# Altium PCB WX0.012.032PCB-4.2.PcbDoc
Units mil, origin at the board's own origin, x right, y up, seen from the top; angles counter-clockwise.
Board outline 5246.25 x 8356.49 mil, 2 copper layers (Top Layer, Bottom Layer); 36 components, 37 nets, 102 pads, 174 vias.
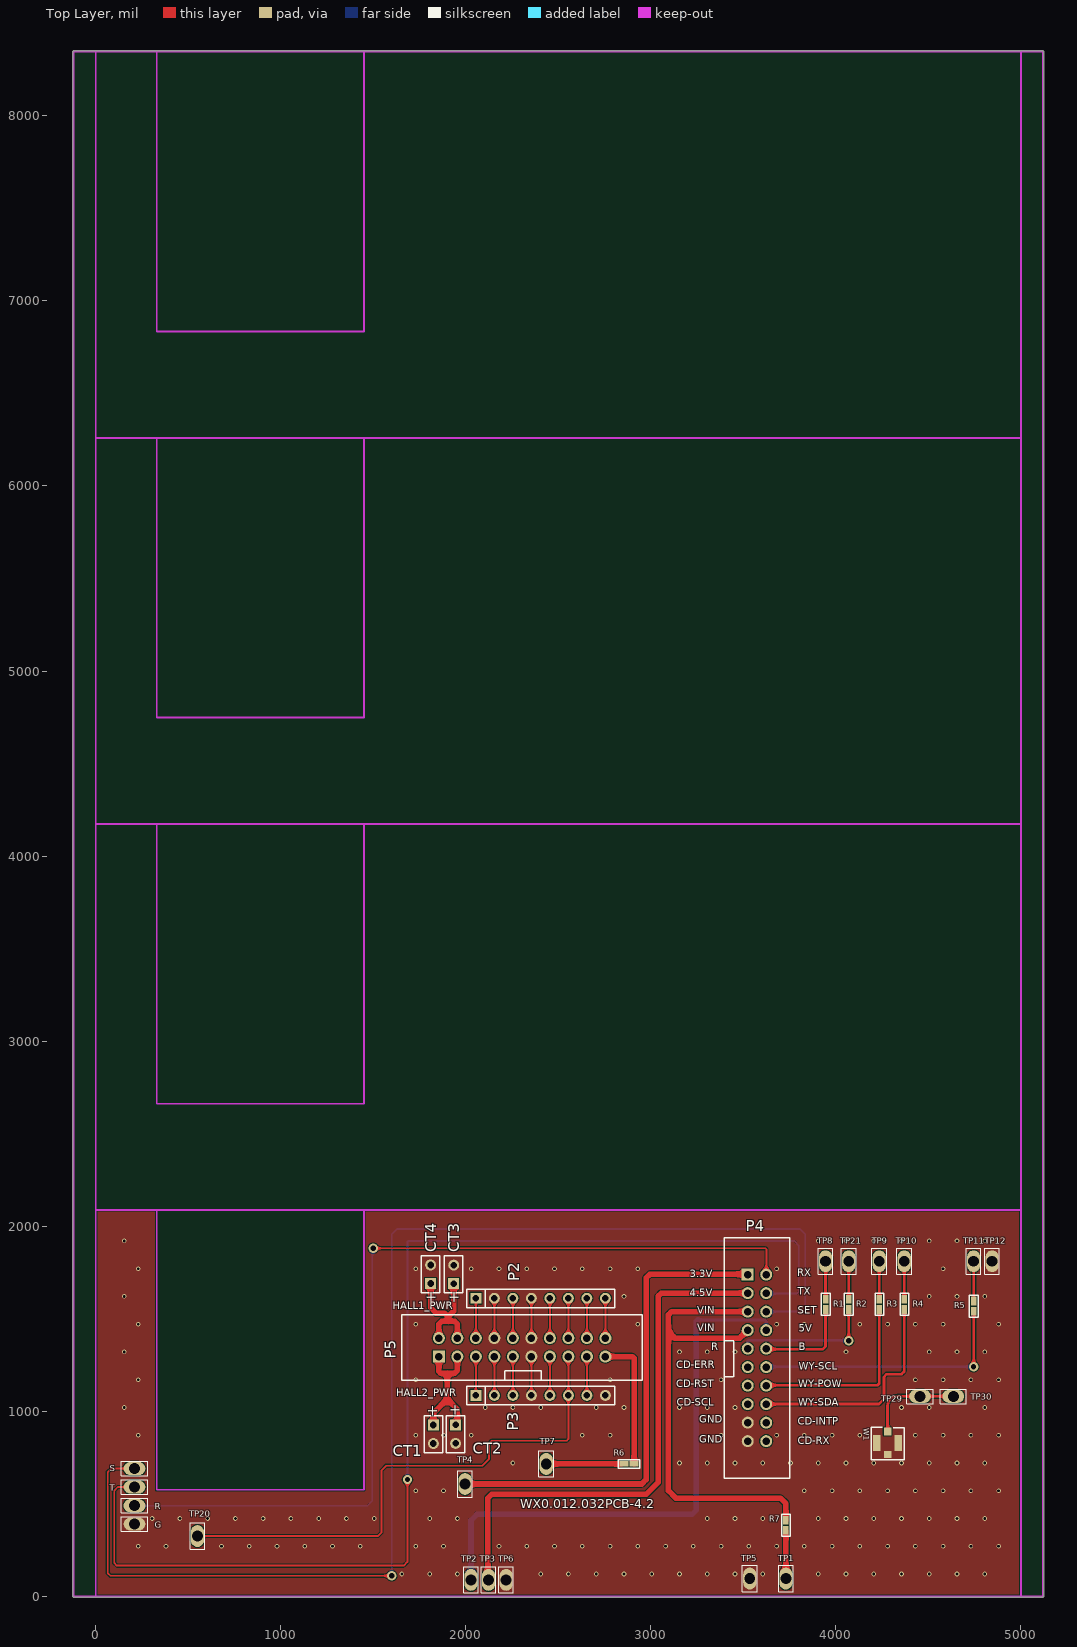
[diagram p0: Top Layer view]
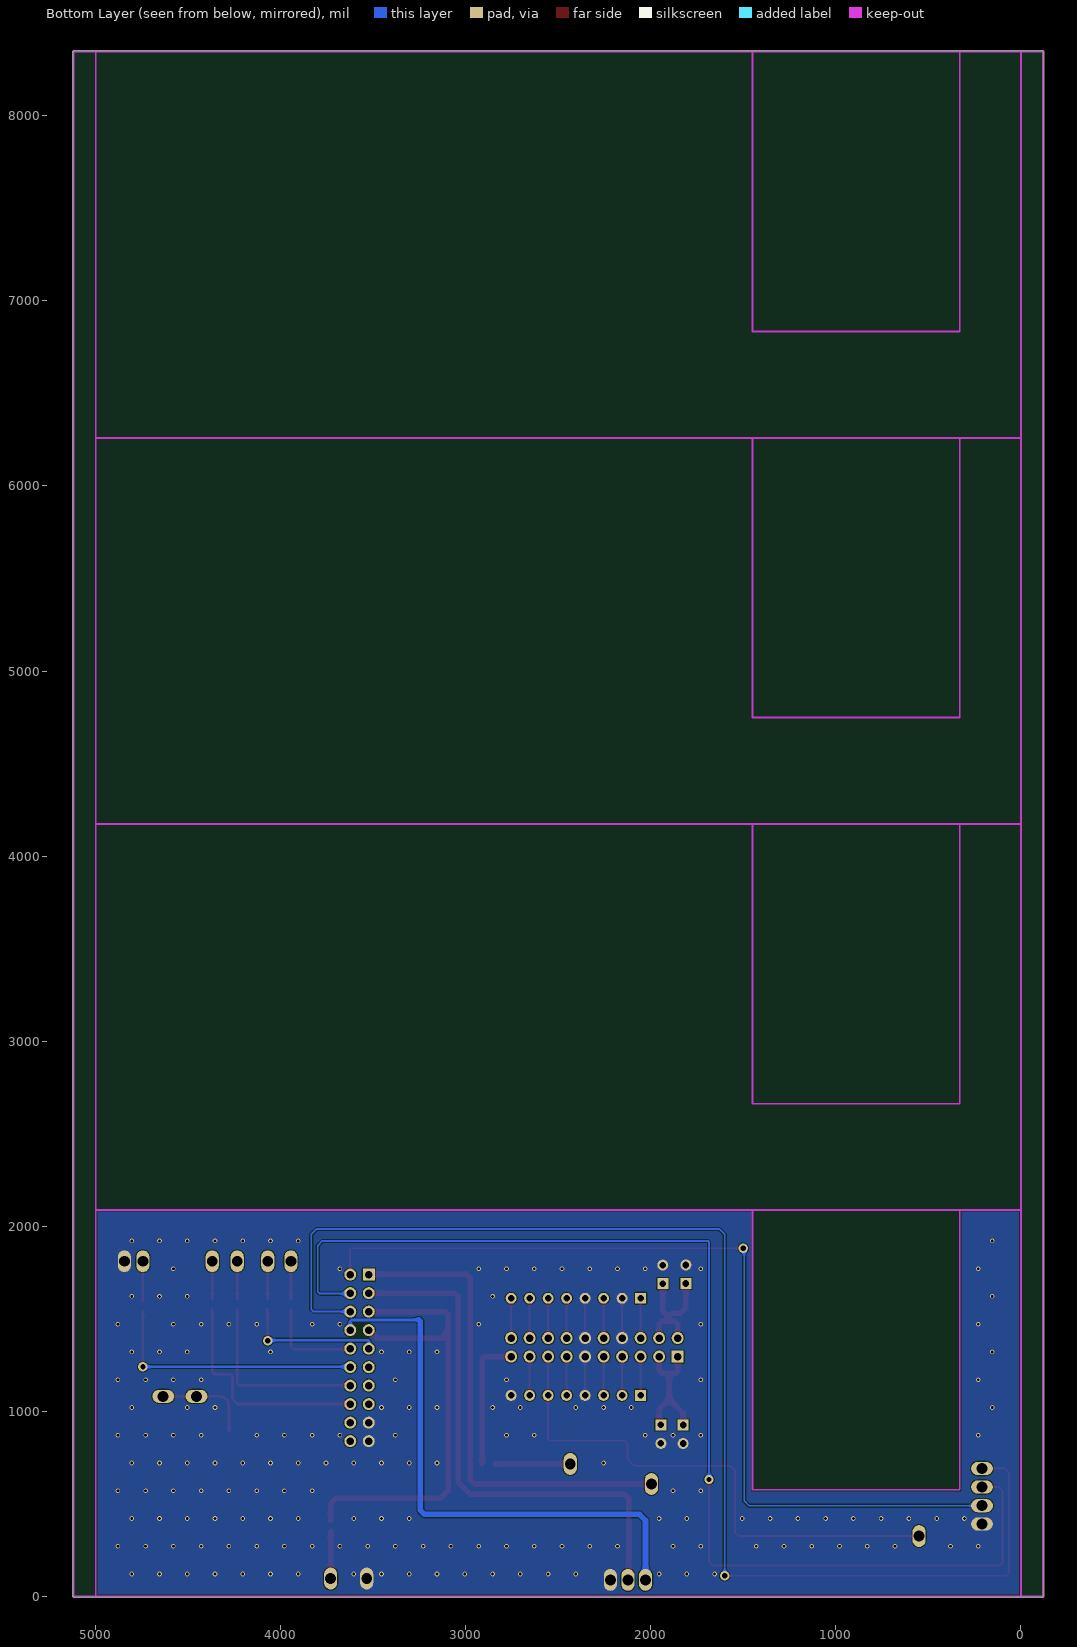
[diagram p1: Bottom Layer view, seen from below]

## Layer stack, top to bottom
Top Solder: solder mask 0.4, Solder Resist, Dk 3.5
Top Layer: signal copper 1.4
Dielectric 1: dielectric 12.6, FR-4, Dk 4.8
Bottom Layer: signal copper 1.4
Bottom Solder: solder mask 0.4, Solder Resist, Dk 3.5

## Board outline
-118.11,-5.01 cw(c-118.11,0) -123.13,0 -123.13,8346.46 cw(c-118.11,8346.46) -118.11,8351.47 5118.11,8351.47 cw(c5118.11,8346.46) 5123.13,8346.46 5123.13,0 cw(c5118.11,0) 5118.11,-5.01

## Design rules (kind name [scope] priority, off if disabled: settings)
Clearance [All] p1: gap=5 ignorepadtopadclearanceinfootprint=TRUE
ComponentClearance [All] p1: gap=10 collisioncheckmode=3 verticalgap=0 showdistances=FALSE
HoleToHoleClearance [All] p1: gap=0 allowstackedmicrovias=TRUE
MinimumSolderMaskSliver [All] p1: minsoldermaskwidth=0
PlaneConnect [All] p1: planeconnectstyle=Direct reliefexpansion=20 reliefentries=4 reliefconductorwidth=10 reliefairgap=10
PolygonConnect [All] p1: connectstyle=Direct reliefconductorwidth=10 reliefentries=4 polygonreliefangle="90 Angle" airgapwidth=10
RoutingVias [All] p1: holewidth=28 width=50 viastyle="Through Hole" minholewidth=28 minwidth=50 maxholewidth=28 maxwidth=50
SilkToSilkClearance [All] p1: silktosilkclearance=0
SilkToSolderMaskClearance [IsPad] p1: minsilkscreentomaskgap=0 clearancetoexposedcopper=TRUE
SolderMaskExpansion [All] p1: expansion=4
Width [All] p1: maxlimit=50 minlimit=10 preferedwidth=10
24 further rules are at their usual default settings.

## Components (designator, comment, footprint, x,y, rotation, side; value= is the part's Value field where it differs from the comment)
CT1 "BAT" BAT2 1824.95,874.53 r270 top
CT2 "BAT" BAT2 1945,875 r270 top
CT3 "BAT" BAT2 1935,1740 r90 top (schematic designator CT1)
CT4 "BAT" BAT2 1810.05,1740.47 r90 top (schematic designator CT1)
G "Test Point" TP5 210,390 r270 top (schematic designator TP7)
P2 "Header 8" HDR1X8 2055,1610 r0 top
P3 "Header 8" HDR1X8 2055,1085 r0 top
P4 "" PHD254_2X10P 3574,1288 r0 top
P5 "" PHD254_2X10P 2305,1345 r90 top (schematic designator P4)
R "Test Point" TP5 209.39,489 r270 top (schematic designator TP7)
R1 "22" R0603LLL 3945,1544.1 r90 top
R2 "22" R0603LLL 4070,1544.1 r90 top (schematic designator R1)
R3 "22" R0603LLL 4235,1543.9 r90 top (schematic designator R1)
R4 "22" R0603LLL 4370,1543.9 r90 top (schematic designator R1)
R5 "22" R0603LLL 4745,1533.9 r90 top (schematic designator R1)
R6 "22" R0603LLL 2848.9,715 r0 top (schematic designator R1)
R7 "22" R0603LLL 3730,349.92 r90 top (schematic designator R1)
S "Test Point" TP5 210,690 r270 top (schematic designator TP7)
T "Test Point" TP5 210,590 r270 top (schematic designator TP7)
TP1 "Test Point" TP5 3730,95 r0 top (schematic designator TP7)
TP2 "Test Point" TP5 2028.39,88.2 r0 top (schematic designator TP7)
TP3 "Test Point" TP5 2123.39,88.2 r0 top (schematic designator TP7)
TP4 "Test Point" TP5 1996.39,606.2 r0 top (schematic designator TP7)
TP5 "Test Point" TP5 3535,95 r0 top (schematic designator TP7)
TP6 "Test Point" TP5 2218.39,88.2 r0 top (schematic designator TP7)
TP7 "Test Point" TP5 2435,715 r0 top
TP8 "Test Point" TP5 3945,1810 r0 top (schematic designator TP7)
TP9 "Test Point" TP5 4235,1810 r0 top (schematic designator TP7)
TP10 "Test Point" TP5 4370,1810 r0 top (schematic designator TP7)
TP11 "Test Point" TP5 4745,1810 r0 top (schematic designator TP7)
TP12 "Test Point" TP5 4845,1810 r0 top (schematic designator TP7)
TP20 "Test Point" TP5 550,325 r0 top (schematic designator TP7)
TP21 "Test Point" TP5 4070,1810 r0 top (schematic designator TP7)
TP29 "Test Point" TP5 4455,1080 r270 top (schematic designator TP7)
TP30 "Test Point" TP5 4635,1080 r270 top (schematic designator TP7)
W1 "ANT-IPEX" ANT-IPEX 4280,829.96 r180 top

## Footprints (in the part's own frame and the unit in brackets; to place one, negate y for a bottom-side part, rotate by r counter-clockwise, add the part's x,y. Pads: shape width x height; smd on the part's side, far side on the other; paste and mask are expansions set on the pad)
ANT-IPEX [mm] "IPX天线座"
  rect 1x1.05 smd: 1(0,-1.525)
  rect 1x2.2 smd: 2(-1.475,0.025) 2(1.475,0.025)
  rect 1x1 smd: 2(0,1.626)
  silkscreen extent -2.26,-2.08 2.26,2.38
BAT2 [mm]
  rect 1.5x1.5 hole 0.9: 1(-1.282,0.001)
  round 1.5 hole 0.9: 2(1.258,0.001)
  silkscreen extent -2.55,-1.27 2.53,1.27
HDR1X8 [mm] "Connector; Header; 8 Position"
  rect 1.5x1.5 hole 0.9: 1(0,0)
  round 1.5 hole 0.9: 2(2.54,0) 3(5.08,0) 4(7.62,0) 5(10.16,0) 6(12.7,0) 7(15.24,0) 8(17.78,0)
  silkscreen extent -1.27,-1.27 19.05,1.27, body extent -1.27,-1.27 19.05,1.27, height 8.54
PHD254_2X10P [mil]
  rect 65x65 hole 40: 1(-50,450)
  round 65 hole 40: 2(50,450) 3(-50,350) 4(50,350) 5(-50,250) 6(50,250) 7(-50,150) 8(50,150) 9(-50,50) 10(50,50) 11(-50,-50) 12(50,-50) 13(-50,-150) 14(50,-150) 15(-50,-250) 16(50,-250) 17(-50,-350) 18(50,-350) 19(-50,-450) 20(50,-450)
  silkscreen extent -177,-650 177,650
R0603LLL [mil]
  rect 47.24x31 smd: 1(5.9,0) 2(61.1,0)
  silkscreen extent -26,-24 92,23
TP5 [mm]
  oval 1.8x3 hole 1.5: 1(0,0)
  silkscreen extent -1,-1.8 1,1.8

## Part data
CT1 CT2 CT3 CT4: "电池"
G R S T TP1 TP2 TP3 TP4 TP5 TP6 TP7 TP8 TP9 TP10 TP11 TP12 TP20 TP21 TP29 TP30: library part "Test Point  PASS", "测试点"
P2 P3: "Header, 8-Pin"
P4 P5: library part "Header 10X2  PASS", "Header, 10-Pin, Dual row"
R1 R2 R3 R4 R5 R6 R7: library part RES2
W1: library part 1010902-0053, "IPEX，配GPRS天线转接线"

## Via types
v1: diameter 25, hole 15, Top Layer to Bottom Layer, tented both sides, 169 vias
v2: diameter 50, hole 28, Top Layer to Bottom Layer, tented both sides, 5 vias

## Nets (pads, with @x,y where several pads share a name; then routed paths per layer and width w, separated by ;. In a path a pad name is that pad's centre, name@x,y a point inside that pad or via, vN(x,y) a via of type N, cw(c..) or ccw(c..) an arc to the next point about the centre after c; other vN are vias at no path point)
3.3V: P4.1 TP4.1 | length 2636.6
  Top Layer w30: TP4.1 2951.2,606.2 2975,630 2975,1720 2995,1740 3522,1740 P4.1
3.6V: P4.3 TP3.1 | length 2895.5
  Top Layer w30: TP3.1 2120,91.58 2120,530 2140,550 2975,550 3040,615 3040,1621 3057,1638 P4.3
5V: P4.8 TP2.1 | length 3016.3
  Bottom Layer w15: 3253,1493 3617,1493 3625,1485 3625,1439 P4.8
  Bottom Layer w30: TP2.1 2028.39,410 2060,441.61 3223.39,441.61 3245,463.23 3245,1485 3253,1493
119: P3.6 P5.15 TP20.1 | length 2913.5
  Top Layer w10: TP20.1 1525,325 1545,345 1545,680 1570,705 2090,705 2125,740 2125,825 2140,840 2545,840 2555,850 P3.6 P5.15
GND: CT1.2 CT2.2 CT3.2 CT4.2 G.1 P2.2 P2.4 P3.4 P3.8 P4.17 P4.19 P5.8 P5.11 P5.12 TP5.1 TP6.1 TP12.1 W1.2 | length 642.1
  Top Layer w10: P2.2@2150,1610 2155,1605 P5.8 ; P3.4 P5.11 ; P5.12 P2.4
  other v1: 1655,120 1805,120 1955,120 2405,120 2555,120 2705,120 2855,120 3005,120 3155,120 3305,120 3455,120 3605,120 3905,120 4055,120 4205,120 4355,120 4505,120 4655,120 4805,120 230,270 380,270 680,270 830,270 980,270 1130,270 1280,270 1430,270 1730,270 1880,270 2180,270 2330,270 2480,270 2630,270 2780,270 2930,270 3080,270 3230,270 3380,270 3530,270 3680,270 3830,270 3980,270 4130,270 4280,270 4430,270 4580,270 4730,270 4880,270 305,420 455,420 605,420 755,420 905,420 1055,420 1205,420 1355,420 1505,420 1805,420 1955,420 3305,420 3455,420 3605,420 3905,420 4055,420 4205,420 4355,420 4505,420 4655,420 4805,420 1730,570 1880,570 3830,570 3980,570 4130,570 4280,570 4430,570 4580,570 4730,570 4880,570 2255,720 3155,720 3305,720 3455,720 3605,720 3755,720 3905,720 4055,720 4205,720 4355,720 4505,720 4655,720 4805,720 230,870 1730,870 1880,870 2030,870 2630,870 2780,870 3380,870 3680,870 3830,870 3980,870 4130,870 4430,870 4580,870 4730,870 4880,870 155,1020 2105,1020 2255,1020 2405,1020 2705,1020 2855,1020 3155,1020 3305,1020 3455,1020 4355,1020 4505,1020 4805,1020 230,1170 1730,1170 2780,1170 3380,1170 4430,1170 4580,1170 4730,1170 4880,1170 155,1320 3155,1320 3305,1320 3455,1320 4055,1320 4505,1320 4655,1320 4805,1320 230,1470 1730,1470 2930,1470 3680,1470 3830,1470 4130,1470 4280,1470 4430,1470 4580,1470 4880,1470 155,1620 2855,1620 4505,1620 4655,1620 4805,1620 230,1770 1730,1770 2030,1770 2180,1770 2330,1770 2480,1770 2630,1770 2780,1770 2930,1770 3680,1770 4580,1770 155,1920 3905,1920 4055,1920 4205,1920 4355,1920 4505,1920 4655,1920 4805,1920
HALL1_PWR: CT3.1 CT4.1 P5.2 P5.4 | length 725.1
  Top Layer w30: CT4.1 1810,1560 1840,1530 1885,1530 1905,1510 ; P5.2 1855,1470 1870,1485 1905,1485 ; CT3.1 1934.95,1539.95 1905,1510 ; P5.4 1955,1470 1940,1485 1905,1485 ; 1905,1485 1905,1510
HALL2_PWR: CT1.1 CT2.1 P5.1 P5.3 | length 742.9
  Top Layer w30: CT1.1 1825,990 1900,1065 ; P5.1 1855,1215 1865,1205 1900,1205 ; CT2.1 1955,935.41 1955,1010 1900,1065 ; P5.3 1955,1220 1940,1205 1900,1205 ; 1900,1065 1900,1205
MOTO_B: P4.10 R1.1 | length 528.5
  Top Layer w15: P4.10 3627,1335 3930,1335 3945,1350 R1.1
MOTO_B_1: R1.2 TP8.1 | length 204.8
  Top Layer w15: R1.2 TP8.1
MOTO_R: P4.9 R2.1 | length 764
  Top Layer w15: v2(4070,1380) 4070,1540 4075,1545 R2.1
  Bottom Layer w15: P4.9 3524,1379 3528,1383 4067,1383 v2(4070,1380)
MOTO_R_1: R2.2 TP21.1 | length 204.8
  Top Layer w15: R2.2 TP21.1
MY_POW: P4.14 R3.1 | length 1015.8
  Top Layer w15: P4.14 3626,1140 4225,1140 4235,1150 R3.1
MY_POW_1: R3.2 TP9.1 | length 205
  Top Layer w15: R3.2 TP9.1
MY_SCL: P4.12 R5.1 | length 1421.6
  Top Layer w15: v2(4745,1240) R5.1
  Bottom Layer w15: P4.12 3626,1240 v2(4745,1240)
MY_SCL_1: R5.2 TP11.1 | length 215
  Top Layer w15: R5.2 TP11.1
MY_SDA: P4.16 R4.1 | length 1224.4
  Top Layer w15: P4.16 4233,1038 4260,1065 4260,1185 4275,1200 4355,1200 4370,1215 R4.1
MY_SDA_1: R4.2 TP10.1 | length 205
  Top Layer w15: R4.2 TP10.1
NewNet1: P3.1 P5.5 | length 210
  Top Layer w10: P3.1 P5.5
NewNet2: P2.1 P5.6 | length 215
  Top Layer w10: P5.6 P2.1
NewNet3: P3.2 P5.7 | length 210
  Top Layer w10: P3.2 P5.7
NewNet4: P3.3 P5.9 | length 210
  Top Layer w10: P3.3 P5.9
NewNet5: P2.3 P5.10 | length 215
  Top Layer w10: P5.10 P2.3
NewNet6: P3.5 P5.13 | length 210
  Top Layer w10: P3.5 P5.13
NewNet7: P2.5 P5.14 | length 215
  Top Layer w10: P5.14 P2.5
NewNet8: 
NewNet9: P2.6 P5.16 | length 215
  Top Layer w10: P5.16 P2.6
NewNet10: P3.7 P5.17 | length 210
  Top Layer w10: P3.7 P5.17
NewNet11: P2.7 P5.18 | length 215
  Top Layer w10: P5.18 P2.7
NewNet12: P2.8 P5.20 | length 215
  Top Layer w10: P5.20 P2.8
RX: P4.2 R.1 | length 4927.9
  Top Layer w10: v2(1500,1880) 3620,1880 3625,1875 3625,1739 P4.2
  Bottom Layer w10: R.1 1469,489 1495,515 1495,1875 v2(1500,1880)
SET: P4.6 S.1 | length 6965.3
  Top Layer w10: S.1 85,690 65,670 65,125 80,110 v2(1600,110)
  Bottom Layer w10: v2(1600,110) 1600,1955 1630,1985 3805,1985 3835,1955 3835,1550 3823,1538 P4.6
tianxian: TP29.1 TP30.1 W1.1 | length 523
  Top Layer w15: W1.1 4280,1028.79 cw(c4331.21,1028.79) 4295,1065 cw(c4331.21,1028.79) 4331.21,1080 TP29.1 TP30.1
TP7: P5.19 R6.2 | length 729.1
  Top Layer w30: P5.19 2900,1295 2910,1285 R6.2
TP7_1: R6.1 TP7.1 | length 404.8
  Top Layer w30: TP7.1 R6.1@2839.81,715
TX: P4.4 T.1 | length 6396.6
  Top Layer w10: T.1 120,590 100,570 100,180 115,165 1665,165 1685,185 v2(1685,630)
  Bottom Layer w10: v2(1685,630) 1685,1915 1690,1920 3775,1920 3800,1895 3800,1645 3790,1635 3627,1635 P4.4
VIN: P4.5 P4.7 R7.2 | length 2600.7
  Top Layer w30: P4.7 3481,1395 3130,1395 3095,1430 ; P4.5 3113,1538 3095,1520 3095,1430 ; R7.2 3730,500 3700,530 3135,530 3095,570 3095,1430
VIN_1: R7.1 TP1.1 | length 254.9
  Top Layer w30: TP1.1 R7.1@3730,349.92
pads on no net: P4.11 P4.13 P4.15 P4.18 P4.20

## Polygon pours and split planes (outlines as drawn)
GND on Top Layer "Top Layer-No Net" (solid, remove dead copper, pour order 0): 0,0 0,2086.61 330,2086.61 330,575 1450,575 1450,2086.61 5000,2086.61 5000,0
GND on Bottom Layer "Top Layer-No Net1" (solid, remove dead copper, pour order 1): 0,0 0,2086.61 330,2086.61 330,575 1450,575 1450,2086.61 5000,2086.61 5000,0

## Keep-outs
Keep-Out Layer:
  lines w10: 0,0 -118.11,0 -118.11,8346.46 0,8346.46 ; 0,0 5000,0 ; 0,0 0,2086.61 ; 0,2086.61 0,4173.23 ; 0,2086.61 5000,2086.61 ; 0,2086.61 330,2086.61 330,575 1450,575 1450,2086.61 5000,2086.61 ; 0,4173.23 0,6259.84 ; 0,4173.23 5000,4173.23 ; 0,4173.23 330,4173.23 330,2661.61 1450,2661.61 1450,4173.23 5000,4173.23 ; 0,6259.84 0,8346.46 ; 0,6259.84 5000,6259.84 ; 0,6259.84 330,6259.84 330,4748.23 1450,4748.23 1450,6259.84 5000,6259.84 ; 0,8346.46 330,8346.46 ; 330,8346.46 1450,8346.46 ; 330,8346.46 330,6834.84 1450,6834.84 1450,8346.46 ; 1450,8346.46 5000,8346.46 ; 5000,0 5118.11,0 5118.11,8346.46 5000,8346.46 ; 5000,0 5000,2086.61 ; 5000,2086.61 5000,4173.23 ; 5000,4173.23 5000,6259.84 ; 5000,6259.84 5000,8346.46

## Silkscreen, mask and mechanical layers (free items; w line width, h text height)
Top Overlay:
  text "RX" at 3792,1728 h39.37
  text "3.3V" at 3212,1724 h39.37
  text "TX" at 3794,1628 h39.37
  text "4.5V" at 3211,1622 h39.37
  text "HALL1_PWR" at 1605,1550 h39.37
  text "SET" at 3794,1527 h39.37
  text "VIN" at 3252,1526 h39.37
  text "VIN" at 3252,1431 h39.37
  text "5V" at 3799,1428 h39.37
  text "R" at 3328,1330 h39.37
  text "B" at 3800,1329 h39.37
  text "CD-ERR" at 3138,1231 h39.37
  text "WY-SCL" at 3799,1224 h39.37
  text "CD-RST" at 3138,1129 h39.37
  text "WY-POW" at 3797,1128 h39.37
  text "HALL2_PWR" at 1625,1080 h39.37
  text "WY-SDA" at 3798,1029 h39.37
  text "CD-SCL" at 3141,1028 h39.37
  text "GND" at 3263,937 h39.37
  text "CD-INTP" at 3794,926 h39.37
  text "GND" at 3263,828 h39.37
  text "CD-RX" at 3795,822 h39.37
  text "WX0.012.032PCB-4.2" at 2295,475 h50

## Text inside footprints (layer, text, board x,y; h text height)
CT1: Top Overlay "+" at 1796.95,1034.53 h59.06 r270
CT2: Top Overlay "+" at 1918,1040 h59.06 r270
CT3: Top Overlay "+" at 1963,1580 h59.06 r90
CT4: Top Overlay "+" at 1838.05,1580.47 h59.06 r90